# Altium PCB 94KA02-V1.PcbDoc (part 2 of 2)
Units mil, origin at the board's own origin, x right, y up, seen from the top; angles counter-clockwise.
Board outline 3951 x 3526 mil, 2 copper layers (Top Layer, Bottom Layer); 144 components, 142 nets, 661 pads, 434 vias.
Unrouted connection lines stored in the file: 1.
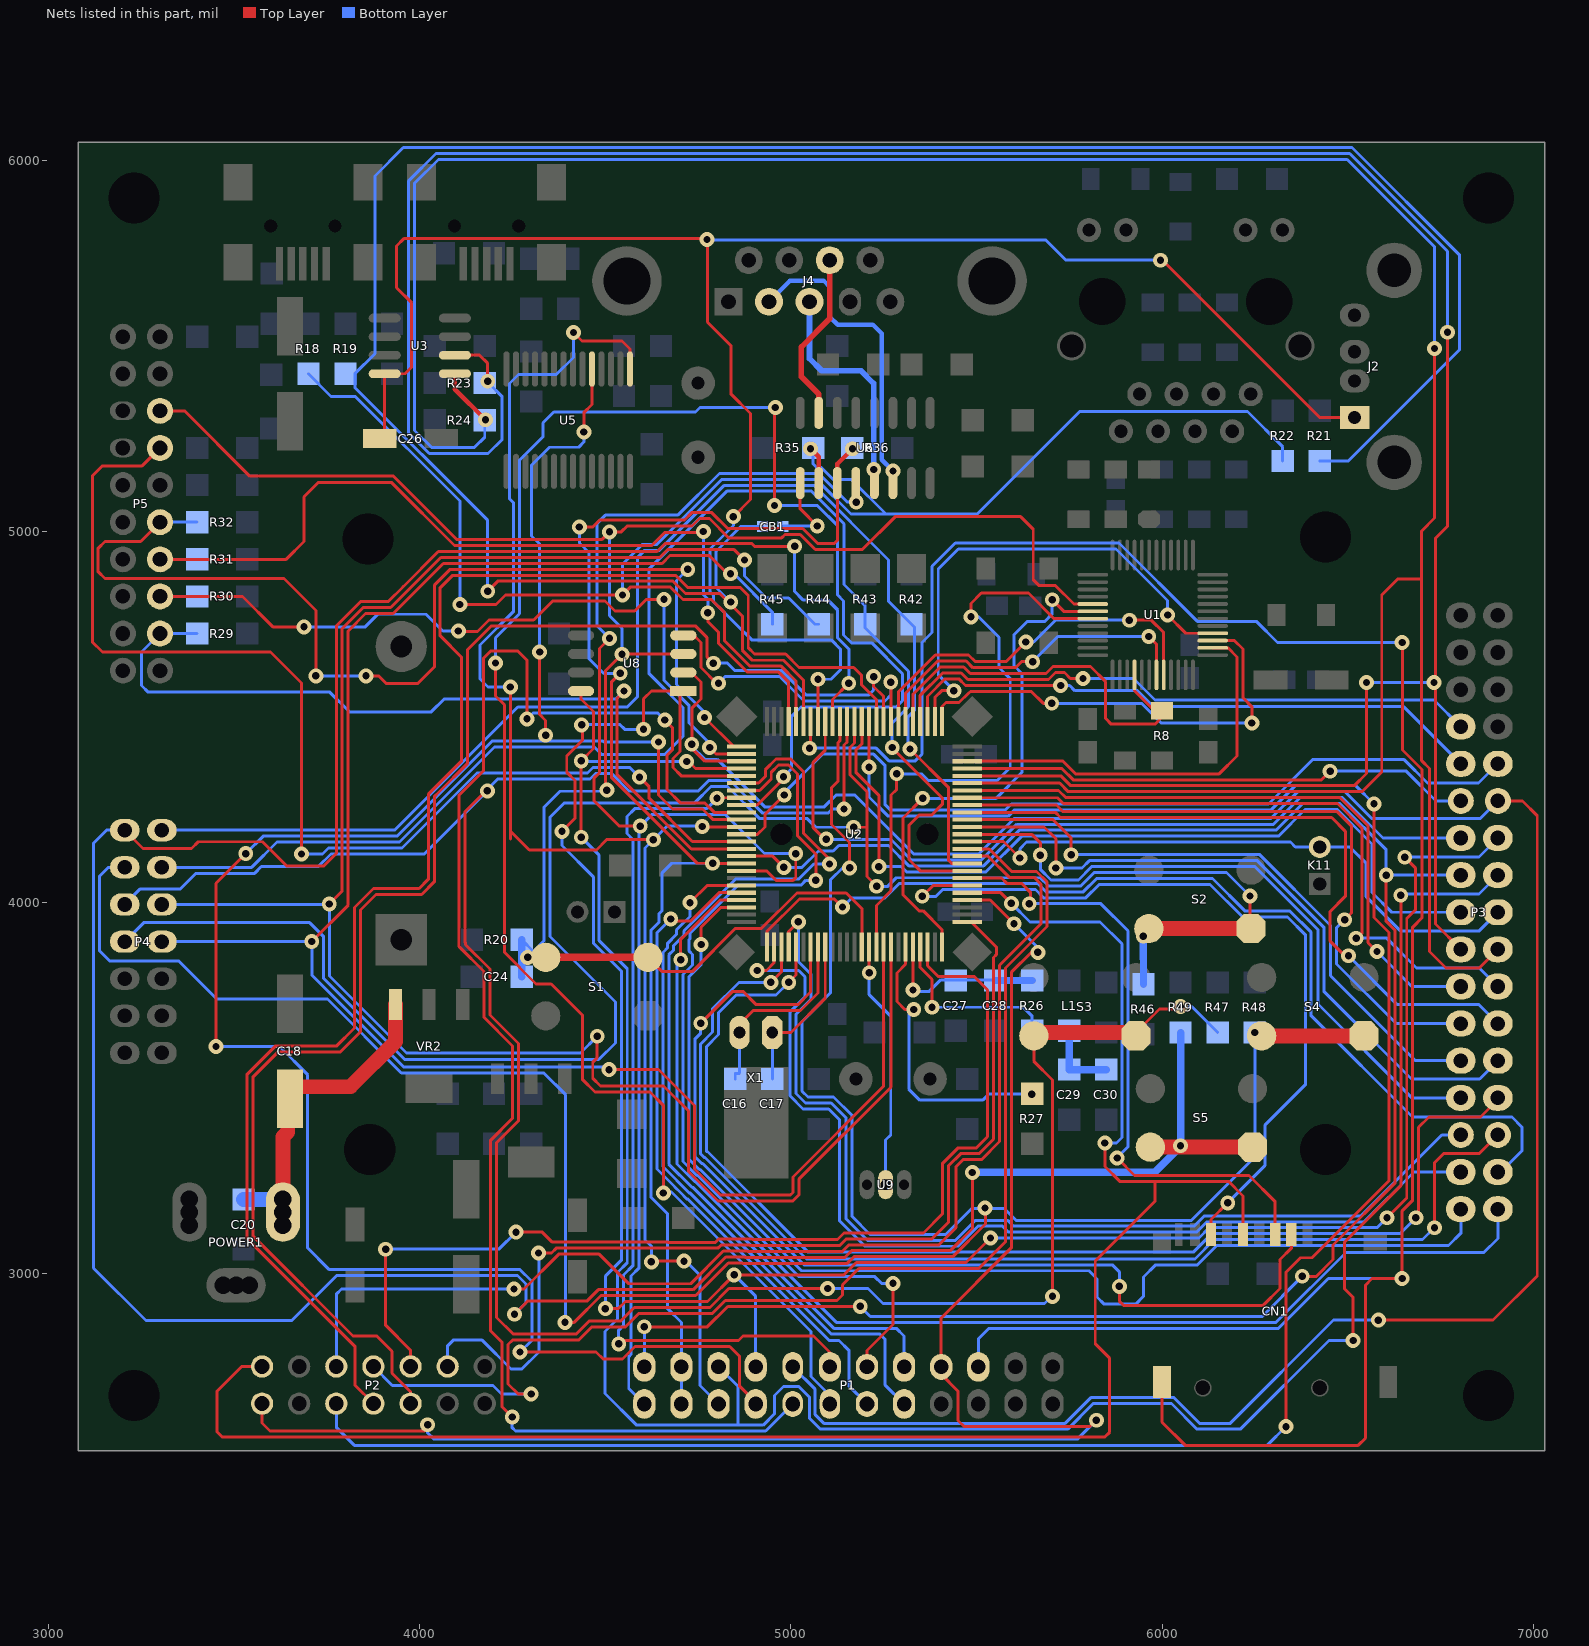
[diagram p2: the nets of this part, all layers, seen from the top]

## Via types
v1: diameter 40, hole 19.68, Top Layer to Bottom Layer, 416 vias
v2: diameter 40, hole 20, Top Layer to Bottom Layer, 16 vias
v3: diameter 50, hole 27.56, Top Layer to Bottom Layer, 1 vias
v4: diameter 40, hole 19.68, Top Layer to Bottom Layer, tented bottom, 1 vias

## Nets (pads, with @x,y where several pads share a name; then routed paths per layer and width w, separated by ;. In a path a pad name is that pad's centre, name@x,y a point inside that pad or via, vN(x,y) a via of type N, cw(c..) or ccw(c..) an arc to the next point about the centre after c; other vN are vias at no path point) (continued)
PA0: P2.10 U2.23 | length 2828.9
  Top Layer w8: v1(3908,3066) 3908,2861 3975,2794 P2.10@3975,2750 ; v1(4259,3112) 4330,3112 4357,3085 4669.15,3085 4669.44,3084.71 4796.46,3084.71 4804.75,3093 4895.51,3093 4896.51,3092 5125.24,3092 5143.24,3110 5357,3110 5408,3161 5408,3296.62 5450.75,3339.37 5500.12,3339.37 5530,3369.25 5530,3765 5494,3801 5397,3801 5368.07,3829.93 U2.23@5368.07,3880
  Bottom Layer w8: v1(3908,3066) 4213,3066 v1(4259,3112)
PA2: U1.30 U2.25 | length 1495.1
  Top Layer w8: v1(5355,4281) 5302,4228 5302,4021 5345,3978 5356.38,3978 5407.44,3926.94 U2.25@5407.44,3880 ; v1(5704,4816) 5735.16,4784.84 U1.30@5813.58,4784.84
  Bottom Layer w8: v1(5355,4281) 5553,4281 5623,4351 5623,4401 ; 5623,4459 5623,4412 ; v1(5704,4816) 5704,4778 5683,4757 5636,4757 5601,4722 5601,4638.63 5623,4616.63 5623,4412 ; 5623,4401 5623,4412 ; 5623,4401 5623,4412
PA3: P2.12 U2.26 | length 2695.6
  Top Layer w8: v1(4320,3056) 4355,3056 4367.71,3068.71 4803.09,3068.71 4811.37,3077 4888.88,3077 4889.88,3076 5131.86,3076 5149.86,3094 5380,3094 5424,3138 5424,3290 5457.37,3323.37 5506.74,3323.37 5546,3362.63 5546,3852 5553.58,3859.58 5553.58,3880.42 5486.09,3947.91 U2.26@5475.35,3947.91
  Bottom Layer w8: P2.12@4075,2750 4075,2806 4090,2821 4168,2821 4246,2743 4275,2743 4321,2789 v1@4321,3055
PA4: P1.18 P2.1 U2.29 | length 4396.1
  Top Layer w8: P2.1@3575,2650 3575,2598 3596.5,2576.5 v2@4013,2576.5 ; U2.29@5475.35,4006.97 5537.03,4006.97 v1(5601,3943) ; v1(5665.48,3865.85) 5648.15,3865.85 5648,3866 5594,3812 5594,3070 5405,2881 P1.18@5405,2749 5405,2729 5450.5,2683.5 5450.5,2604.5 5467,2588 5806,2588 v2(5823,2605)
  Bottom Layer w8: v2(4021,2593) 4021,2571.5 4037.5,2555 5773,2555 v2(5823,2605) ; v1(5601,3943) 5665.48,3878.52 v1@5665.48,3868 ; v1@5665.48,3868 v1(5665.48,3865.85) 5667.63,3868 v1@5665.48,3868
PA5: CN1.5 P2.2 U2.30 | length 5058.2
  Top Layer w8: P2.2@3575,2750 3520,2750 3454,2684 3454,2573.5 3467,2560.5 5583,2560.5 ; U2.30@5475.99,4026.02 U2.30@5475.35,4026.65 5565.35,4026.65 v1(5594,3998) ; 5587,2560.5 5583,2560.5 ; v1(5846,3352) 5846,3289 5886,3249 5981,3249 ; CN1.5@6218.39,3105.69 6218.39,3209.61 6179,3249 5981,3249 ; 5583,2560.5 5846.5,2560.5 5859,2573 5859,2772 5820,2811 5820,3034 5981,3195 5981,3249
  Bottom Layer w8: v1(5594,3998) 5644,3948 5833,3948 5892,3889 5892,3367 5877,3352 v1(5846,3352)
PA6: CN1.7 U2.31 | length 2173.5
  Top Layer w8: v1(5354,4017) v1@5356,4019 ; v1@5356,4017 v1@5356,4019 ; v1@5356,4021 v1@5356,4019 ; U2.31@5475.02,4046 U2.31@5475.35,4046.34 5383.34,4046.34 v1@5356,4019 ; CN1.7@6131.77,3105.69 6131.77,3145.77 v1(6177,3191)
  Bottom Layer w8: v1@5356,4019 v1(5354,4017) 5391,4017 5409,4035 5658.86,4035 5680.86,4013 5794.51,4013 5830.51,4049 6129.37,4049 6217.37,3961 6338.37,3961 6386,3913.37 6386,3702 6386,3509 6277,3400 6277,3291 v1(6177,3191)
PA7: CN1.3 U2.32 | length 1701.1
  Top Layer w8: U2.32@5475.35,4066.02 5567.72,4066.02 5581.75,4052 5621,4052 5645,4028 5645,4000 v1(5642,3997) ; v1(5879,3312) 5926,3265 6234,3265 6305,3194 CN1.3@6305,3105.69
  Bottom Layer w8: v1(5642,3997) 5835,3997 5908,3924 5908,3342 5879,3313 v1(5879,3312)
PA8: P3.22 U2.67 | length 2197.5
  Top Layer w8: U2.67@5092.48,4488.27 5092.48,4410.48 5060,4378 5060,4202 5091,4171 v1(5095,4171)
  Bottom Layer w8: v1(5095,4171) 5094,4170 5269.37,4170 5324.37,4115 5512.75,4115 5608.75,4211 6300.25,4211 6372.25,4283 6486.12,4283 6595.12,4174 P3.22@6805,4174
PA9: C26.1 J2.1 U2.68 U3.8 | length 5140.6
  Top Layer w8: C26.1@3904,5243 3905.51,5244.51 3905.51,5333.51 U3.8@3905.51,5425 3949,5425 3960,5425 3978,5443 3978,5616 3937,5657 3937,5769 3957,5789 4773,5789 v1@4775,5787 ; v1(4774,5787) v1@4775,5787 ; v1@4843,5042 v1(4845,5040) 4891,5086 4891,5318.02 4838,5371.02 4838,5501 4775,5564 v1@4775,5787 ; U2.68@5072.8,4488.27 v1(5072.8,4601.8) ; v1(5996,5731) 5996,5734 5998,5734 6424.8,5307.2 J2.1@6518.9,5307.2
  Bottom Layer w8: v1(4774,5787) 4774,5788 4776,5786 5686,5786 5740,5732 5996,5732 v1(5996,5731) ; v1(4845,5040) 4845,5016 4782,4953 4782,4838 4792,4828 4792,4810.25 4855,4747.25 4894.25,4708 5027,4708 5108.37,4708 5133,4683.37 5133,4627 5107.8,4601.8 v1(5072.8,4601.8) 5098.8,4601.8
PA10: CN1.10 P1.20 U2.69 | length 6571.7
  Top Layer w8: v1(5050,4416) 5053.11,4419.11 U2.69@5053.11,4488.27 ; CN1.10@5999.88,2708.06 5999.88,2600.12 6062.5,2537.5 6528.5,2537.5 6548,2557 6548,2969 6566,2987 v1(6647,2987) ; v1@6648,2988 v1(6647,2987) ; v1@6648,4701 6648,4411.37 6700.49,4358.88 6700.49,3959 6675.37,3933.88 6675.37,3197.74 6647,3169.37 v1(6647,2987)
  Bottom Layer w8: v1(5050,4416) 5229.75,4416 5263.75,4382 5335,4382 5353,4400 5353,4701.03 5380,4728.03 5380,4906 5443,4969 5884,4969 6095,4758 6254,4758 6311,4701 v1(6647,4701) ; P1.20@5505,2749 5505,2824 5534,2853 6314,2853 6448,2987 v1(6647,2987)
PA11: CB1.1 CB1.2 R19.1 R21.2 U2.70 U6.9 | length 6841.7
  Top Layer w8: v1(4183,4839) 4210,4866 4682.37,4866 4715.74,4832.63 4808.37,4832.63 4869,4772 4869,4680.14 4896.14,4653 4980.25,4653 5033.43,4599.83 U2.70@5033.43,4488.27 ; U6.9@5025,5105 U6.9@5025,5130.51 5025,5061 v1(5071,5015)
  Bottom Layer w8: v1(4183,4839) 4183,5030 3825,5388 3825,5425 3879,5479 3879,5958 3955.5,6034.5 6512.13,6034.5 6801,5745.63 6801,5489 6502,5190 R21.2@6425,5190 ; 4798,4871.75 4798,4849 ; v1(4838,4810) 4837,4810 4798,4849 ; CB1.2@4923,5013 4922,5014 4865.63,5014 4798,4946.37 4798,4849 ; CB1.1@4978,5013 4980,5015 v1(5071,5015) v1@5070,5014
PA12: R18.1 R22.2 R35.2 U2.71 U6.10 | length 4608.8
  Top Layer w8: v1(4108,4803) 4205,4803 4231,4829 v1(4546,4829) 4567,4850 4675.75,4850 4709.12,4816.63 4785.62,4816.63 4821.43,4780.82 4821.43,4705.08 4889.51,4637 4973.63,4637 5013.74,4596.89 U2.71@5013.74,4488.27
  Top Layer w12: v1(5053,5223) 5075,5201 U6.10@5075,5130.51
  Bottom Layer w8: R18.1@3700,5425 3761,5364 3826.37,5364 4108,5082.37 v1(4108,4803) ; v1(4546,4829) 4546,4911.88 4599.25,4965.13 4638.62,4965.13 4813.99,5140.5 5068.5,5140.5 5162,5047 5255,5047 ; R35.2@5060,5225 5060,5182 5069.5,5172.5 5081.75,5172.5 5114.63,5139.63 5163.37,5139.63 5256,5047 5502,5047 5778,5323 6230,5323 6325,5228 R22.2@6325,5190
  Bottom Layer w12: v1(5053,5223) R35.2@5053,5237
PA13: P5.7 R31.1 U2.72 | length 2478.2
  Top Layer w8: P5.7@3300,4925 3640,4925 3688,4973 3688,5093.5 3727,5132.5 3923.17,5132.5 4093.66,4962 4625,4962 4660,4997 4761,4997 v1(4764,5000) ; v1(4776,4781) 4776,4757.37 4805.43,4727.93 4805.43,4698.45 4882.88,4621 4967,4621 4994.05,4593.95 U2.72@4994.05,4488.27
  Bottom Layer w8: P5.7@3300,4925 R31.1@3400,4925 ; v1@4764,5015 v1(4764,5000) 4764,4830 4776,4818 v1(4776,4781)
PA14: P5.9 R32.1 U2.76 | length 3006.3
  Top Layer w8: P5.9@3300,5025 3248,4973 3151.5,4973 3133.5,4955 3133.5,4941 3133.5,4891.5 3152,4873 3634,4873 3720,4787 v1(3720,4611) ; v1(3855,4611) 3855.69,4610.31 3889.69,4610.31 3909,4591 3995,4591 4039,4635 4039,4855 4082,4898 v1(4722,4898) ; v1(4767,4499) 4845.65,4420.35 U2.76@4867.09,4420.35
  Bottom Layer w8: P5.9@3300,5025 R32.1@3400,5025 ; v1(3720,4611) v1(3855,4611) ; v1(4722,4898) 4692,4868 4692,4587.63 4767,4512.63 v1(4767,4499)
PA15: P5.5 R30.1 U2.77 | length 2119
  Top Layer w8: P5.5@3309,4826 3308,4825 3522,4825 3604,4743 v1(3688,4743) ; v1(4104,4732) 4105.31,4730.69 4155.31,4730.69 4186.41,4761.78 4306.78,4761.78 4358,4813 4499,4813 4526,4786 4579,4786 4610,4817 v1(4658,4817) ; v1(4781,4418) 4798.33,4400.67 U2.77@4867.09,4400.67
  Bottom Layer w8: P5.5@3300,4825 R30.1@3400,4825 ; v1(3688,4743) 3853,4743 3887,4777 4017,4777 4062,4732 v1(4104,4732) ; v1(4658,4817) 4658,4599 4725,4532 4725,4485 4781,4429 v1@4781,4419
PB0: P2.6 U2.35 | length 3285.2
  Top Layer w8: v1(4254,2959) 4280.63,2959 4374.34,3052.71 4483.29,3052.71 4563,2973 4730,2973 4818,3061 4882.25,3061 4883.25,3060 5138.49,3060 5156.49,3078 5399,3078 5445,3124 5445,3288.37 5464,3307.37 5513.37,3307.37 5562,3356 5562,3831 5674,3943 5674,4049.37 5655.37,4068 5588.37,4068 5531.29,4125.08 U2.35@5475.35,4125.08
  Bottom Layer w8: P2.6@3775,2750 3775,2945 3789,2959 v1(4254,2959)
PB1: P2.8 U2.36 | length 3384.2
  Top Layer w8: v2(4300,2676) 4265,2676 4238,2703 4238,2809.37 4249.63,2821 4427.63,2821 4462.63,2856 4553,2856 4590,2893 ; 4600.75,2893 4590,2893 ; U2.36@5475.35,4144.76 5534.24,4144.76 5595,4084 5662,4084 5690,4056 5690,3935.63 5578,3823.63 5578,3086 5506,3014 5183,3014 5139,2970 5139,2943 5124,2928 4823.25,2928 4788.25,2893 4590,2893
  Bottom Layer w8: P2.8@3875,2750 3926,2699 4197,2699 4220,2676 v2(4300,2676)
PB2: K11.2 P3.17 U2.37 | length 1652.9
  Top Layer w8: U2.37@5475.35,4164.45 5572.55,4164.45 v1(5617,4120)
  Bottom Layer w8: v1(5617,4120) 5617,4145 5635,4163 6346,4163 6359,4150 K11.2@6425,4150 6506,4150 6550,4106 6550,4016 6642,3924 6855,3924 P3.17@6905,3974
PB3: P5.13 U2.89 | length 3114.5
  Top Layer w8: P5.13@3300,5225 3252,5177 3145,5177 3117.5,5149.5 3117.5,4702.5 3145,4675 3598,4675 3681,4592 v1(3681,4131) ; v1(4592,4338) 4618,4312 4618,4280.88 4734.43,4164.45 U2.89@4867.09,4164.45
  Bottom Layer w8: v1(3681,4131) 3738,4131 3754,4147 3951.88,4147 4153.88,4349 4452,4349 4467,4364 4566,4364 v1(4592,4338)
PB4: P5.3 R29.1 U2.90 | length 2268.5
  Top Layer w8: v1(4550,4570) 4551,4571 4552,4571 4532,4551 4532,4344.25 4731.49,4144.76 U2.90@4867.09,4144.76
  Bottom Layer w8: R29.1@3400,4725 P5.3@3300,4725 3250,4675 3250,4585 3268,4567 3757.37,4567 3810.37,4514 4031,4514 4065,4548 4528,4548 v1(4550,4570)
PB5: P1.2 P3.20 U2.91 | length 5390.5
  Top Layer w8: v1(4605,2857) 4774.88,2857 4829.88,2912 v1(5187,2912) v1@5181,2906 ; U2.91@4867.09,4125.08 4950.92,4125.08 v1(4981,4095) ; v1(6378,2993) 6416,2993 6461,3038 6461,3077.37 6627.37,3243.74 6627.37,3926.26 6604,3949.63 v1(6604,4074)
  Bottom Layer w8: P1.2@4605,2749 4605,2844 v1@4619,2858 ; v1@4618,2858 v1@4618,2865 ; v1(4981,4095) 5030,4095 5074,4139 5114,4139 5129,4154 5262.75,4154 5317.75,4099 5519.37,4099 5615.37,4195 6306.88,4195 6378.88,4267 6479.49,4267 6604,4142.49 v1(6604,4074) ; v1(5187,2912) 5214,2885 6270,2885 v1(6378,2993) ; v1@6604,4069 v1(6604,4074) ; P3.20@6805,4074 v1(6604,4074)
PB6: P1.3 P1.4 R36.2 U2.92 U6.11 | length 3847
  Top Layer w8: v1(4430,5012) 4466,5012 4485,5031 4713,5031 4732.69,5050.69 4786.94,5050.69 4829.63,5008 5031.63,5008 5072.26,4967.37 5117,4967.37 5125,4975.37 U6.11@5125,5130.51 ; v1(4540,4618) 4516,4594 4516,4337.63 4747.63,4106 v1(4789,4106) ; v1@4789,4105.39 U2.92@4867.09,4105.39 U2.92@4866.48,4106
  Top Layer w12: U6.11@5125,5130.51 5125,5182 v1(5166,5223)
  Bottom Layer w8: v1(4430,5012) 4430,4969 4456,4943 4456,4657 4496,4617 4539,4617 4539,4619 v1(4540,4618) ; P1.3@4705,2649 P1.4@4705,2749 4705,2868.63 4668,2905.63 4668,3160.75 4623,3205.75 4623,3925.63 4644,3946.63 4644,3969.25 4652,3977.25 4652,4079 4679,4106 v1(4789,4106)
  Bottom Layer w12: R36.2@5165,5225 5166,5224 v1(5166,5223)
PB7: P1.1 U2.93 U6.12 | length 4007.9
  Top Layer w8: v1(4511,4712) 4484,4685 4484,4350 4469,4335 4469,4275 4538,4206 v1(4594,4206) ; U2.93@4867.09,4085.71 4934.29,4085.71 4960,4060 5006,4060 5013,4067 v1(5013,4132) ; v1@5176,5078 v1(5176,5079)
  Bottom Layer w8: v1(4511,4712) 4478,4745 4478,5022 4500,5044 4694.86,5044 4807.36,5156.5 5075.13,5156.5 5152.63,5079 v1(5176,5079) v1@5175,5078 ; v1@4594,4207 v1(4594,4206) ; P1.1@4605,2649 4563,2691 4563,2776.4 4568.94,2782.34 4568.94,2994.06 4591,3016.12 4591,4203 v1(4594,4206) ; v1(5013,4132) 4929,4132 4824,4237 4625,4237 v1(4594,4206)
PB8: P1.15 U2.95 | length 1886.9
  Top Layer w8: v1(4728,4000) 4774.34,4046.34 U2.95@4867.09,4046.34
  Bottom Layer w8: v1(4728,4000) 4728,3962.75 4692,3926.75 4692,3914.75 4668,3890.75 4668,3878.88 4655,3865.88 4655,3288.63 4726.63,3217 4729.02,3217 5109.02,2837 5240,2837 5253,2824 5253,2701 P1.15@5305,2649
PB9: P1.13 U2.96 | length 1823
  Top Layer w8: v1@4672.52,3950 4729.37,3950 4806.03,4026.65 U2.96@4867.09,4026.65
  Bottom Layer w8: v1@4679.11,3952.89 v1(4676,3956) 4639,3919 4639,3282 4701.07,3219.93 ; 4688,3233 4701.07,3219.93 ; P1.13@5205,2649 5156,2698 5156,2794 5129.8,2820.2 5103.2,2820.2 4722.4,3201 4720,3201 4701.07,3219.93
PB10: P3.24 U2.47 | length 1384.9
  Top Layer w8: U2.47@5475.35,4361.3 5730.07,4361.3 5760.46,4330.92 6429.92,4330.92 v1(6453,4354)
  Bottom Layer w8: v1(6453,4354) 6658,4354 6738,4274 P3.24@6805,4274
PB11: U1.2 U2.48 | length 1103.4
  Top Layer w8: U2.48@5475.35,4380.98 5733.02,4380.98 5767.08,4346.92 6153.92,4346.92 6202,4395 6202,4662 6177.58,4686.42 U1.2@6136.42,4686.42
PB12: U1.3 U2.51 | length 1226.9
  Top Layer w8: U2.51@5407.44,4488.27 5407.44,4528.44 5418,4539 5453,4539 5478.2,4564.2 5478.64,4564.2 5483.57,4569.13 5647.87,4569.13 5680,4537 v1(5703,4537) ; U1.3@6136.42,4706.1 6194.9,4706.1 6218,4683 6218,4552 6242,4528 v1(6242,4484)
  Bottom Layer w8: v1(5703,4537) 5831,4537 5944.75,4537 5997.75,4484 v1(6242,4484)
PB13: U1.4 U2.52 | length 1352.6
  Top Layer w8: U2.52@5387.76,4488.27 5387.76,4552.62 5406.14,4571 v1(5439,4571) ; v1(6015,4775) 6064.21,4725.79 U1.4@6136.42,4725.79
  Bottom Layer w8: v1@5438,4574 5440,4572 v1@5440,4571 ; v1(5439,4571) v1@5440,4571 ; v1(6015,4775) 6015,4814 5876,4953 5451,4953 5397,4899 5397,4614 v1@5440,4571
PB14: P3.26 U2.53 | length 1621.2
  Top Layer w8: U2.53@5368.07,4488.27 5368.07,4555.56 5415.51,4603 5452.25,4603 5470.12,4585.13 v1@5726.61,4585.13 ; v1@5725,4586.75 v1@5726.61,4585.13 ; v1@5726.61,4585.13 v1(5726.75,4585) v1@5726.61,4585.13
  Bottom Layer w8: v1(5726.75,4585) 5751,4585 5765,4571 5933.37,4571 5976.37,4528 6622,4528 6651,4528 P3.26@6805,4374
PB15: P3.28 U2.54 | length 1627.6
  Top Layer w8: U2.54@5348.39,4488.27 5348.39,4558.5 5408.88,4619 5458.88,4619 5476.75,4601.13 5694.13,4601.13 5713,4620 5737,4620 5753,4604 v1(5787,4604)
  Bottom Layer w8: v1(5787,4604) 5923,4604 5981,4546 6733,4546 P3.28@6805,4474
PC0: U2.15 U9.2 | length 670
  Top Layer w8: U2.15@5210.59,3880 5210.59,3811.41 v1(5211,3811)
  Bottom Layer w8: v1(5211,3811) 5211,3752 5269,3694 5269,3374 5255,3360 U9.2@5255,3240
PC1: U1.31 U2.16 | length 1684.2
  Top Layer w8: U2.16@5230.28,3880 5230.28,3992.28 5270,4032 5270,4290 5285,4305 v1(5285,4347) ; v1(5485,4770) 5485,4806 5513,4834 5640,4834 5708.84,4765.16 U1.31@5813.58,4765.16
  Bottom Layer w8: v1(5285,4347) 5352,4347 5370,4329 5555.75,4329 5591,4364.25 5591,4603.37 5561,4633.37 5561,4714.75 5505.75,4770 v1(5485,4770)
PC2: P4.8 R45.1 U2.17 | length 5101.7
  Top Layer w8: v1(3709,3895) 3807,3993 3807,4732 3854,4779 3928.25,4779 4063.25,4914 4653,4914 4674,4935 4780,4935 v1@4829,4886 ; v1(4510,3550) 4643,3550 4740,3453 4740,3282 4809.97,3212.03 4998.28,3212.03 5005.31,3219.06 5005.31,3260.94 5249.96,3505.59 U2.17@5249.96,3880
  Bottom Layer w8: P4.8@3305,3895 v1(3709,3895) 3709,3804.75 3956.75,3557 4503,3557 v1(4510,3550) ; v1@4829,4886 4846.37,4886 4950,4782.37 R45.1@4950,4750
  other v1: 4837,4886
PC3: P4.6 R44.1 U2.18 | length 5389.4
  Top Layer w8: v1(3756,3996) 3791,4031 3791,4738.63 3847.37,4795 3921.63,4795 4056.63,4930 4646.37,4930 4667.37,4951 4847,4951 v1(4875,4923) ; v1(4478,3640) 4478,3582 4466,3570 4466,3527 4487,3506 4657,3506 4724,3439 4724,3275.37 4803.34,3196.03 5004.91,3196.03 5021.31,3212.43 5021.31,3254.31 5269.65,3502.65 U2.18@5269.65,3880
  Bottom Layer w8: P4.6@3305,3995 v1@3755,3995 ; v1@3757,3995 3757,3802 3964,3595 4433,3595 v1(4478,3640) ; v1(4875,4923) 4875,4880 4934,4821 4994,4821 5065,4750 R44.1@5075,4750
PC4: P4.4 R43.1 U2.33 | length 3981.6
  Top Layer w8: v1(5273,4418) 5273,4416.75 5407.98,4281.76 5407.98,4264.98 5378.69,4235.69 5345,4235.69 5318,4208.69 5318,4116 5348.29,4085.71 U2.33@5475.35,4085.71
  Bottom Layer w8: P4.4@3305,4095 3547,4095 3615,4163 3945.25,4163 4201.25,4419 4470,4419 4490,4399 4660,4399 4709,4448 4709,4525.37 4618,4616.37 4618,4899.25 4827.25,5108.5 5055.25,5108.5 5143,5020.75 5143,4857 5200,4800 R43.1@5200,4750 5200,4740.15 5317,4623.15 5317,4528 5273,4484 v1(5273,4418)
PC5: P4.2 R42.1 U2.34 | length 3660.3
  Top Layer w8: v1(5321,4414) 5423.98,4311.02 5423.98,4134.29 5423.98,4114.61 5433.2,4105.39 U2.34@5475.35,4105.39
  Bottom Layer w8: P4.2@3305,4195 3932,4195 4264,4527 4559,4527 4586,4554 4586,4929.25 4605.87,4949.13 4645.25,4949.13 4820.62,5124.5 5061.87,5124.5 5263,4923.37 5263,4812 5278,4797 ; v1(5321,4414) 5316,4414 5316,4501 5333,4518 5333,4742 R42.1@5325,4750 ; 5278,4797 R42.1@5325,4750 ; 5278,4797 R42.1@5325,4750
PC6: P4.7 R46.1 S2.1 U2.63 | length 5275.3
  Top Layer w8: v1(5169,4203) 5202,4203 5205,4206 ; U2.63@5171.22,4488.27 5171.22,4430 5159,4417.78 5159,4344.37 5205,4298.37 5205,4206 ; v1(5231,4044) 5205,4070 5205,4206 ; v1(5949.53,3909.14) 5949,3927 5949,3930 S2.1@5950,3930 ; v1(6237,4018) 6237,3933 S2.1@6240,3930
  Top Layer w20: S2.1@5949,3927 v1(5949.53,3909.14)
  Top Layer w40: S2.1@5964.41,3930 S2.1@6240,3930
  Bottom Layer w8: P4.7@3205,3895 3256,3946 3703.25,3946 3741,3908.25 3741,3795.37 3959.37,3577 4482,3577 4527,3622 4527,3732.49 4351,3908.49 4351,4230 4390,4269 4741,4269 4785,4313 4829,4313 4916,4226 5044,4226 5067,4203 v1(5169,4203) ; v1(5231,4044) 5261,4044 5284,4067 5672.12,4067 5694.12,4045 5781.25,4045 5817.25,4081 6174,4081 v1(6237,4018)
  Bottom Layer w20: v1(5949.53,3909.14) R46.1@5950,3780
PC7: P4.5 R47.1 S3.1 U2.64 | length 6854
  Top Layer w8: v1(4182,4301) 4178,4301 4122,4245 4122,3893 4123,3892 4123,3886.75 4189,3820.75 4189,3697.42 4266,3620.42 4266,3412 4207,3353 4207,2882.37 4252.37,2837 4421,2837 4456,2872 4541,2872 4578,2909 4781.63,2909 4832.63,2960 v1(5099,2960) ; v1(5143,4252) 5143,4424.41 5151.54,4432.94 U2.64@5151.54,4488.27 ; S3.1@5654.7,3641.3 S3.1@5654.41,3641.59 ; v1(5705,2939) 5705,3522 5654.41,3572.59 S3.1@5654.41,3641 S3.1@5654.41,3641.59 ; S3.1@5930,3641 S3.1@5930,3650 ; S3.1@5930,3669.93 S3.1@5930,3650 ; v1(6050,3720) 6043,3713 5993,3713 S3.1@5930,3650 ; S3.1@5654.41,3641.59 5654.41,3650 5646,3650 S3.1@5654.41,3641.59
  Top Layer w40: S3.1@5654.41,3650 S3.1@5930,3650
  Bottom Layer w8: P4.5@3205,3995 3247,4037 3355,4037 3397,4079 3555,4079 3573,4097 3726.63,4097 3760.63,4131 4012,4131 v1(4182,4301) ; v1@4180,4303 4210,4333 4458.63,4333 4473.63,4348 4517,4348 4564,4301 4750.37,4301 4778.37,4329 4835.63,4329 4922.63,4242 5101,4242 5111,4252 v1@5142,4252 ; v1(5099,2960) 5208,2960 5248,2920 5683,2920 v1@5705,2942 ; v1(6050,3720) 6080,3720 R47.1@6150,3650
PC8: P4.3 R48.1 S4.1 U2.65 | length 6958.1
  Top Layer w8: v1(4391,2869) 4416,2869 4488,2941 4743.25,2941 4831.25,3029 4869,3029 4870,3028 5151.75,3028 5169.75,3046 5436,3046 5524,3134 v1@5524,3177 ; U2.65@5131.85,4488.27 5131.85,4435.88 5127,4431.03 5127,4327 5109.44,4309.44 5109.44,4210.56 5158,4162 v1@5158,4093.57 ; S4.1@6535,3645 6533,3645 6533,3643 6533,3641 S4.1@6544,3641
  Top Layer w40: S4.1@6268.41,3641 6531,3641 S4.1@6535,3645
  Bottom Layer w8: v1@4393,2871 4393,3482 4334,3541 3950.12,3541 3751.12,3740 3453,3740 3350,3843 3164,3843 3137,3870 3137,4071 3161,4095 P4.3@3203,4095 ; 5060,3710 5107,3757 5107,4061.75 5138.82,4093.57 v1(5158.31,4093.57) ; 5060.5,3709.5 5030,3679 5030,3492 5046,3476 5115,3476 5165,3426 5165,3154 5212.99,3106.01 5417.01,3106.01 5487,3176 5574.63,3176 5606.63,3144 6079.57,3144 6250,3314.43 v1(6250,3650) ; P4.3@3203,4095 P4.3@3205,4095 P4.3@3203,4095
  other v1: 5523,3177
PC9: P4.1 R49.1 S5.1 U2.66 | length 8778
  Top Layer w8: P4.1@3205,4195 3254,4146 3385,4146 3403,4164 3576,4164 3641,4099 3741.98,4099 3775,4132.02 3775,4745.25 3840.75,4811 3915,4811 3956,4852 ; 3955,4852 3956,4852 ; v1(4255,2891) 4290,2926 4450,2926 4481,2957 4736.63,2957 4824.63,3045 4875.63,3045 4876.63,3044 5145.12,3044 5163.12,3062 5429.37,3062 5489,3121.63 v1(5489,3273) ; v1(5010,4960) 4902,4960 4895,4967 4660.75,4967 4639.75,4946 4050,4946 3956,4852 ; U2.66@5112.17,4488.27 5112.17,4547.17 v1(5156,4591)
  Top Layer w20: v1(6050,3345) v1@6054,3341
  Top Layer w40: S5.1@5968.41,3341 v1@6054,3341 ; v1@6055,3341 S5.1@6244,3341
  Bottom Layer w8: P4.1@3223,4195 P4.1@3205,4195 3156,4195 3121,4160 3121,3015 3262,2874 3655,2874 3776,2995 4263.25,2995 4286,2972.25 4286,2922 v1(4255,2891) ; v1(5010,4960) 5010,4838 5032,4816 5099,4816 5126,4789 5126,4786.75 ; 5107.75,4805 5126,4786.75 ; v1(5156,4591) 5156,4683 5126,4713 5126,4754 ; 6050,3406 R49.1@6050,3650 ; 5126,4754 5126,4786.75 ; 5126,4754 5126,4786.75
  Bottom Layer w20: v1(5489,3273) 5980,3273 6050,3343 v1(6050,3345) ; v1@6050,3351 v1(6050,3345) ; R49.1@6050,3650 v1(6050,3345)
PC10: P1.10 P3.23 U2.78 U8.2 | length 6531.8
  Top Layer w8: U8.2@4710,4620 4731.87,4620 4757.43,4594.43 4757.43,4548.43 4733,4524 v1(4733,4426.75) 4733,4416 4768.02,4380.98 U2.78@4867.09,4380.98 ; v1(6583,2875) 6892,2875 7011,2994 7011,4234 6971,4274 P3.23@6905,4274
  Bottom Layer w8: v1(4733,4426.75) 4733,4420.75 4767.75,4386 4801.25,4386 4929.25,4258 5090,4258 5122,4290 5172,4290 5331,4131 5506.12,4131 5602.12,4227 6293.63,4227 6365.63,4299 6492.75,4299 6564.75,4227 6858,4227 P3.23@6905,4274 ; P1.10@5005,2749 5065.5,2688.5 5065.5,2620.14 5088.64,2597 5739,2597 5808,2666 6032,2666 6101,2597 6184,2597 6462,2875 v1(6583,2875)
PC11: P1.6 P3.19 U2.79 U8.8 | length 6531.9
  Top Layer w8: v1(4435,4176) v1(4435,4382) 4468,4415 4468,4515 4434.41,4548.59 U8.8@4434.41,4570 ; v1@4726,4378 4742.7,4361.3 U2.79@4867.09,4361.3 ; v1(6515,2820) 6515,2936 6492,2959 6492,3085.75 6643.37,3237.12 v1(6643.37,4019.63) ; U8.8@4434.41,4570 4435,4570 4435,4569.41 U8.8@4434.41,4570
  Bottom Layer w8: v1(4435,4176) 4483.47,4127.53 4483.47,3897.53 4559,3822 4559,3029.37 4533,3003.37 4533,2878 4499,2844 4499,2677 4583,2593 4858,2593 4858,2696 P1.6@4805,2749 ; v1(4435,4382) 4437,4380 v1(4719,4380) ; 4858,2592 4925.37,2592 4956,2622.63 4956,2672 4980,2696 5021.36,2696 5049.5,2667.86 5049.5,2611.5 5080,2581 5745.63,2581 5814.63,2650 6025.37,2650 6094.37,2581 6211,2581 6450,2820 v1(6515,2820) ; v1(6643.37,4019.63) 6640,4023 6854,4023 P3.19@6905,4074
PC12: P1.8 P3.21 U2.80 U8.1 | length 6255.5
  Top Layer w8: v1(4383,4192) 4418,4227 4418,4329 4396,4351 4396,4395 4438,4437 4438,4482 4436,4480 v1(4436,4479) ; v1(4500,2906) 4535,2906 4554,2925 4775,2925 v1(4847,2997) 5143.37,2997 5176.37,3030 5472,3030 v1(5538,3096) ; v1(4603,4467) 4603,4549 4624,4570 U8.1@4710,4570 4701,4561 4701,4407.25 4682,4388.25 4682,4364 4704.39,4341.61 U2.80@4867.09,4341.61 ; v1(6606,3151) 6659.37,3204.37 6659.37,3957.12 6683.58,3981.33 6683.58,4092.42 v1(6654,4122)
  Bottom Layer w8: v1(4383,4192) 4383,4154 4467.47,4069.53 4467.47,3890.9 4543,3815.37 4543,3036 4500,2993 v1(4500,2906) ; v1(4436,4479) 4437,4480 4539,4480 4552,4467 v1(4603,4467) ; v1(4847,2997) 4905,2939 P1.8@4905,2749 ; v1(5538,3096) 6099.45,3096 6127.45,3124 6579,3124 v1@6605.5,3150.5 ; v1(6654,4122) 6655,4123 6854,4123 P3.21@6905,4174 ; v1@6605.5,3150.5 v1(6606,3151) v1@6605.5,3150.5
PC13: CN1.2 U2.7 | length 2815.1
  Top Layer w8: v1(4757,3675) 4843,3761 4870.61,3761 4906.61,3725 5019.05,3725 5053.11,3759.06 U2.7@5053.11,3880 ; v1(5885,2966) 5885,2926 5896,2915 6273,2915 6318,2960 6318,3038 6348.31,3068.31 CN1.2@6348.31,3105.69
  Bottom Layer w8: v1(4757,3675) 4757,3648 4741,3632 4741,3315.76 4759.76,3297 4762.16,3297 5035.16,3024 5866,3024 5885,3005 v1(5885,2966) v1@5884,2967
PC14: C16.1 U2.8 X1.2 | length 527.6
  Top Layer w8: X1.2@4861.5,3650 4861.5,3672 4898.5,3709 5025.68,3709 5072.8,3756.12 U2.8@5072.8,3880
  Bottom Layer w8: C16.1@4850,3525 4850,3539 4860,3539 4861.5,3540.5 X1.2@4861.5,3650
PC15: C17.1 U2.9 X1.1 | length 454.4
  Top Layer w8: X1.1@4950,3650 5000,3650 5092.48,3742.48 U2.9@5092.48,3880
  Bottom Layer w8: C17.1@4950,3525 X1.1@4950,3650 4950,3654 X1.1@4955,3659
PD0: P1.16 U2.81 | length 2517.6
  Top Layer w8: U2.81@4867.09,4321.93 4913,4321.93 4931,4339.93 4931,4357.88 4960.12,4387 4999.88,4387 5034,4352.88 5034,4186.63 5104,4116.63 v1(5104,4104)
  Bottom Layer w8: v1(5104,4104) 5061.63,4104 5020.63,4063 4851,4063 4711.85,3923.85 4711.85,3911.96 4684,3884.12 4684,3872.25 4671,3859.25 4671,3295.25 4733.25,3233 4735.65,3233 5115.65,2853 5284,2853 5305,2832 P1.16@5305,2749
PD1: P1.14 U2.82 | length 2491
  Top Layer w8: U2.82@4867.09,4302.24 4915.94,4302.24 4947,4333.3 4947,4351.25 4966.75,4371 4993.25,4371 5018,4346.25 5018,4180 5067,4131 v1(5067,4060) ; P1.14@5205,2749 5205,2793 5275,2863 v1(5275,2974)
  Bottom Layer w8: v1(5067,4060) 5040.25,4060 5027.25,4047 4857.63,4047 4727.85,3917.22 4727.85,3902.1 4726,3900.25 4726,3869 4735,3860 4735,3832 4709,3806 4709,3302.51 4746.51,3265 4748.91,3265 5021.91,2992 5226,2992 5244,2974 v1(5275,2974)
PD2: P1.12 U2.83 | length 2393.5
  Top Layer w8: v1(4536,2811) 4545,2820 4859,2820 4871,2832 5061,2832 5105,2788 P1.12@5105,2749 ; v1@4816,4282.56 U2.83@4867.09,4282.56
  Bottom Layer w8: v1(4536,2811) 4536,2848 4549,2861 4549,2996.75 4575,3022.75 4575,4169 4558,4186 4558,4232 4579,4253 4773,4253 v1(4801,4281)
PD3: P1.11 U2.84 | length 5509.4
  Top Layer w8: v1(4204,4645.68) 4204,4557 4228,4533 4228,3866 4313,3781 4354,3781 4438,3697 4438,3524 4472,3490 4620,3490 4656.3,3453.7 v1(4656.3,3217.7) ; U2.84@4867.09,4262.87 4909.24,4262.87 4980,4333.63 v1(4980,4339) ; v1(4956,5070) 4956,5332 v1(4958,5334)
  Bottom Layer w8: v1(4204,4645.68) 4204,4713.37 4269,4778.37 4269,5192 4332,5255 4332,5292.88 4361.12,5322 4743,5322 4755,5334 v1(4958,5334) ; v1(4656.3,3217.7) 4658.79,3220.19 4678.19,3220.19 5054,2844.37 5054,2723 5105,2672 P1.11@5105,2649 ; v1(4956,5070) 5071.12,5070 5126,5015.12 5126,4828.75 5142,4812.75 5142,4721 5163,4700 5217.52,4700 5301,4616.52 5301,4544 5284,4527 5027,4527 5002,4502 5002,4361 v1(4980,4339)
PD4: P1.9 U2.85 | length 4106.4
  Top Layer w8: v2(4249,2614) 4222,2641 4222,2815 4191,2846 4191,3359.63 4250,3418.63 4250,3613.8 4173,3690.8 4173,3814.12 4106,3881.12 4106,4290 4172,4356 4172,4658.93 4191.07,4678 4264,4678 4289,4653 v1(4289,4495) ; v1(4660.25,4492) 4680.44,4471.82 4680.44,4411.44 4666,4397 4666,4305 4703.05,4267.95 4768.68,4267.95 4793.44,4243.19 U2.85@4867.09,4243.19
  Bottom Layer w8: v2(4249,2614) 4249,2585 4258,2576 4932,2576 P1.9@5005,2649 ; v1(4289,4495) 4305,4511 4641.25,4511 v1(4660.25,4492)
PD5: P1.7 U2.86 U5.5 | length 5687.1
  Top Layer w8: v1(3451,3612) 3451,4052 v1(3531,4132) ; v1(4270,2789) 4436,2789 4475,2789 4494,2770 4546,2770 4580,2804 4835,2804 4861,2778 4861,2698 4910,2649 P1.7@4905,2649 ; v1(4323,4675) 4322,4674 4322,4508 4339,4491 v1(4339,4451) ; v1(4442,5268) 4442,5320 4463.98,5341.98 U5.5@4463.98,5437.79 ; v1(4643,4433) 4643,4290 4681.05,4251.95 4762.05,4251.95 4790.5,4223.5 U2.86@4867.09,4223.5
  Bottom Layer w8: v1(3451,3612) 3622,3612 3698,3536 3698,3069 3755,3012 4268.88,3012 4302,2978.88 4302,2821 v1(4270,2789) ; v1(3531,4132) 3578,4179 3938.63,4179 4194.63,4435 v1@4339,4435 ; v1(4323,4675) 4323,4966 4301,4988 4301,5178.75 4349.25,5227 4428,5227 4442,5241 v1(4442,5268) ; v1(4339,4451) v1@4339,4435 ; v1(4643,4433) 4496,4433 4494,4435 v1@4339,4435
PD6: P1.5 U2.87 U5.1 | length 4207.5
  Top Layer w8: 4244,4172 4244,4193 ; v1(4244,4581) 4244,4193 ; v1(4414,5536) 4437,5513 4545,5513 4566.34,5491.66 U5.1@4566.34,5437.79 ; v2(4624,3032) 4626,3034 v2(4712,3034) ; v1(4629.42,4169.42) 4503.42,4169.42 4476,4142 4295,4142 4244,4193 ; v1@4762.18,4203.82 U2.87@4867.09,4203.82
  Bottom Layer w8: v1(4244,4581) 4184,4581 4162,4603 4162,4694 4253,4785 4253,5077 4242,5088 4242,5399 4266,5423 4368,5423 4414,5469 v1(4414,5536) ; v2(4624,3032) 4624,3074 4607,3091 4607,4147 v1(4629.42,4169.42) 4666,4206 v1@4769,4206 ; v2(4712,3034) 4700,3034 4697,3031 4720,3031 4755,2996 4755,2699 P1.5@4805,2649
  other v1: 4761,4205
PD7: P3.25 U2.88 | length 2380.3
  Top Layer w8: U2.88@4867.09,4184.13 4910.13,4184.13 4930,4204 4930,4238 v1(4982,4290)
  Bottom Layer w8: v1(4982,4290) 4982,4295.75 5085,4398.75 5085,4400 5223.12,4400 5253,4370.12 5253,4265 5269,4249 5577,4249 5594,4266 6287,4266 6407,4386 6651,4386 6715,4322 6853,4322 P3.25@6905,4374
PD8: R8.2 U1.40 U2.55 | length 1050.7
  Top Layer w8: U2.55@5328.7,4488.27 5328.7,4561.45 5402.25,4635 5465.51,4635 5483.38,4617.13 5687.51,4617.13 5706.37,4636 5807,4636 5848,4595 5848,4496 5863.11,4480.89 5980.89,4480.89 6000,4500 R8.2@6000,4516.99 ; U1.40@5925.79,4613.58 5925.79,4571.14 R8.2@5975.96,4520.96
PD9: U1.43 U2.56 | length 921.2
  Top Layer w8: U2.56@5309.02,4488.27 5309.02,4564.39 5395.63,4651 5472.14,4651 5490,4633.13 5605.13,4633.13 5621.13,4649.13 v1(5651.27,4649.13) ; v1(5964,4717) 5984.84,4696.16 U1.43@5984.84,4613.58
  Bottom Layer w8: v1(5651.27,4649.13) 5719.13,4717 v1(5964,4717)
PD10: U1.44 U2.57 | length 1016.3
  Top Layer w8: U2.57@5289.33,4488.27 5289.33,4567.33 5389,4667 5478.76,4667 5495.76,4650 5581,4650 v1(5633,4702) ; v1(5912,4761) 5971,4761 6004.53,4727.47 U1.44@6004.53,4613.58
  Bottom Layer w8: v1(5633,4702) 5654,4702 5713,4761 v1(5912,4761)
PD11: U2.58 U8.4 | length 834.4
  Top Layer w8: U8.4@4710,4720 4738,4720 4757.43,4700.57 4757.43,4633.31 4799.75,4591 v1(4805,4591) ; v1(5269,4594) 5269.65,4593.35 U2.58@5269.65,4488.27
  Bottom Layer w8: v1(4805,4591) 4823,4609 4969,4609 5035,4543 5253.3,4543 5269,4558.7 v1(5269,4594)
PD12: P2.9 U2.59 | length 4056.9
  Top Layer w8: P2.9@3975,2650 3975,2682 3925,2732 3925,2791 3884,2832 3820,2832 3551,3101 3551,3531 3617,3597 3785,3597 3840,3652 3840,3980 3882,4022 4005,4022 4039,4056 4039,4285.23 4051.89,4298.11 4128,4374.22 4128,4680.75 4193.03,4745.78 4742.33,4745.78 4773.43,4714.68 4773.43,4662.57 v1(4791,4645) ; v1(5222.81,4608.85) 5222.81,4582.29 5249.96,4555.15 U2.59@5249.96,4488.27
  Bottom Layer w8: v1(4791,4645) 4829,4645 4849,4625 4975.63,4625 5041.63,4559 5209.56,4559 5222.81,4572.25 v1(5222.81,4608.85)
PD13: P2.7 U2.60 | length 4254.6
  Top Layer w8: P2.7@3875,2650 3826,2699 3826,2803.37 3535,3094.37 3535,3537.63 3610.37,3613 3775,3613 3824,3662 3824,3986.63 3875.37,4038 3998.37,4038 4023,4062.63 4023,4291.85 4112,4380.85 4112,4662 4055,4719 4055,4848.37 4088.63,4882 4689,4882 4722.37,4848.63 4864,4848.63 4885,4827.63 4885,4686.76 4901.76,4670 4985.88,4670 5022.09,4633.8 5169.2,4633.8 5190.81,4612.19 5190.81,4586.19 5230.28,4546.72 U2.60@5230.28,4488.27
PD14: P2.5 U2.61 | length 6144.2
  Top Layer w8: v1@5210.59,4352.41 v1(5210.59,4365) U2.61@5210.59,4488.27 ; v1(6334,2588) 6334,3004 6373,3043 6404,3043 6611.37,3250.37 6611.37,3919.63 6571,3960 v1(6571,4266)
  Bottom Layer w8: P2.5@3775,2650 3775,2586 3823.5,2537.5 6283.5,2537.5 v1(6334,2588) ; v1(5210.59,4365) 5210.59,4284.41 5262,4233 5585.49,4233 5602.49,4250 6294,4250 6359,4315 6522,4315 v1(6571,4266)
PD15: P3.18 U2.62 | length 2258.3
  Top Layer w8: U2.62@5190.91,4488.27 5190.91,4427.06 5175,4411.15 5175,4351 5237,4289 v1(5237,4097)
  Bottom Layer w8: v1(5237,4097) 5297.12,4097 5311.12,4083 5526,4083 5622,4179 6313.51,4179 6385.51,4251 6472.86,4251 6566,4157.86 6566,4027 6619,3974 P3.18@6805,3974
PE0: P3.1 U2.97 | length 3380.9
  Top Layer w8: v1(4703,3846) 4703,3901 4717.64,3915.64 ; 4711,3909 4717.64,3915.64 ; U2.97@4867.09,4006.97 4808.97,4006.97 4717.64,3915.64
  Bottom Layer w8: v1@4693,3843 4693,3295.88 4739.88,3249 4742.28,3249 5122.28,2869 6307.37,2869 6495.37,3057 6867,3057 6905,3095 P3.1@6905,3174
PE1: P3.2 U2.98 | length 3214.6
  Top Layer w8: v1(4758,3887) 4758,3933.37 4811.91,3987.28 U2.98@4867.09,3987.28
  Bottom Layer w8: v1(4758,3887) 4758,3832.37 4725,3799.37 4725,3309.14 4753.14,3281 4755.53,3281 5028.53,3008 5803,3008 5825,2986 5825,2937 5844,2918 5929,2918 5950,2939 5950,2991 5983,3024 6095.33,3024 6147.33,3076 6772,3076 6805,3109 P3.2@6805,3174
PE2: P3.3 U2.1 | length 2734
  Top Layer w8: U2.1@4935,3880 4935,3922.16 5022.84,4010 5117,4010 v1(5139,3988)
  Bottom Layer w8: v1(5139,3988) 5163,4012 5252,4012 5291,4051 5665.49,4051 5687.49,4029 5787.88,4029 5823.88,4065 6136,4065 6224,3977 6345,3977 6402,3920 6402,3695 6675,3422 6943,3422 6969.5,3395.5 6969.5,3331 6912.5,3274 P3.3@6905,3274
PE3: P3.4 U2.2 | length 2800.3
  Top Layer w8: v1(4909,3817) 4933.84,3817 ; 4934,3817 4954.68,3837.68 U2.2@4954.68,3880
  Bottom Layer w8: v1(4909,3817) 5021,3817 5038,3800 5038,3746 4998,3706 4998,3478.75 5032.75,3444 5101.75,3444 5130.37,3415.37 5130.37,3143.37 5199.74,3074.01 5450.01,3074.01 5504,3128 5570,3128 5586,3112 6092.82,3112 6120.82,3140 6545,3140 6679,3274 P3.4@6805,3274
PE4: P3.5 U2.3 | length 3205.7
  Top Layer w8: v1(4946,3785) 4974.37,3813.37 ; 4974.37,3814.37 U2.3@4974.37,3880 ; v1@6732,3126 v1(6734,3124) 6734,3299 6759,3324 6855,3324 P3.5@6905,3374
  Bottom Layer w8: v1(4946,3785) 4860,3785 4789,3714 4789,3651 4757,3619 4757,3322.39 4766.39,3313 4768.79,3313 5041.79,3040 6088.71,3040 6140.71,3092 6702,3092 v1(6734,3124)
PE5: P3.6 U2.4 | length 2817.2
  Top Layer w8: U2.4@4994.05,3880 4994.05,3922.15 v1@5019.9,3948 ; v1@5019.9,3948 v1(5020,3948) v1@5019.9,3948
  Bottom Layer w8: v1(5020,3948) 5020,3841 5054,3807 5054,3739.37 5014,3699.37 5014,3485.37 5039.37,3460 5108.37,3460 5149,3419.37 5149,3147.37 5206.36,3090.01 5443.38,3090.01 5497.37,3144 5584,3144 5600,3128 6086.2,3128 6114.2,3156 6536,3156 6754,3374 P3.6@6805,3374
PE6: P3.7 U2.5 | length 3271.3
  Top Layer w8: v1(4994,3785) 5013.74,3804.74 U2.5@5013.74,3880 ; v1(6684,3151) 6691.37,3158.37 6691.37,3394.37 6719,3422 6858,3422 6905,3469 P3.7@6905,3474
  Bottom Layer w8: v1(4994,3785) 4960,3751 4852.63,3751 4805,3703.37 4805,3644.37 4773,3612.37 4773,3329.02 4775.42,3329 5046.41,3058.01 6084.09,3058.01 6134.08,3108 6641,3108 v1(6684,3151)
PE7: P3.8 U2.38 | length 1812.5
  Top Layer w8: U2.38@5475.35,4184.13 5648.87,4184.13 5672,4161 v1(5672,4128)
  Bottom Layer w8: v1(5672,4128) 5672,4089.75 5700.75,4061 5774.63,4061 5810.63,4097 6250,4097 6420,3927 6420,3727 6673,3474 P3.8@6805,3474
PE8: P3.9 U2.39 | length 1895.1
  Top Layer w8: U2.39@5475.35,4203.82 5682.18,4203.82 5714,4172 v1(5714,4093)
  Bottom Layer w8: v1(5714,4093) 5784,4093 5804,4113 6256.63,4113 6436,3933.63 6436,3761 6672,3525 6856,3525 P3.9@6905,3574
PE9: P3.10 U2.40 | length 1704.9
  Top Layer w8: U2.40@5475.35,4223.5 5706.5,4223.5 5755,4175 v1(5755,4129)
  Bottom Layer w8: v1(5755,4129) 6263.25,4129 6454,3938.25 6454,3803 6683,3574 P3.10@6805,3574
PE10: P3.11 U2.41 | length 1896.8
  Top Layer w8: U2.41@5475.35,4243.19 5712.42,4243.19 5726.61,4229 6457,4229 6494,4192 6494,4017 6453,3976 6453,3896 6492.29,3856.71 v1(6502.4,3856.71)
  Bottom Layer w8: v1(6502.4,3856.71) 6634.12,3725 6854,3725 P3.11@6905,3674
PE11: P3.12 U2.42 | length 1847.6
  Top Layer w8: U2.42@5475.35,4262.87 5715.36,4262.87 5733.24,4245 6471.84,4245 6510,4206.84 6510,3972 v1(6492,3954)
  Bottom Layer w8: v1(6492,3954) 6470.4,3932.4 6470.4,3863 6470.4,3834.66 6631.06,3674 P3.12@6805,3674
PE12: P3.13 U2.43 | length 1838.3
  Top Layer w8: U2.43@5475.35,4282.56 5718.3,4282.56 5733.95,4266.92 6472.54,4266.92 6539,4200.46 6539,3917 6526,3904 v1(6523,3904)
  Bottom Layer w8: v1(6523,3904) 6605.75,3904 6685.75,3824 6855,3824 P3.13@6905,3774
PE13: P3.14 U2.44 | length 1783.7
  Top Layer w8: 5526,4302.24 U2.44@5475.35,4302.24 5721.25,4302.24 5740.57,4282.92 6479.17,4282.92 6555,4207.09 6555,3892 v1(6579,3868)
  Bottom Layer w8: v1(6579,3868) 6673,3774 P3.14@6805,3774
PE14: P3.15 R24.1 U2.45 U3.1 | length 7873
  Top Layer w8: U2.45@5475.35,4321.93 5724.19,4321.93 5747.2,4298.92 6538.92,4298.92 6592,4352 6592,4829 6635,4872 6696.58,4872 6699.58,4869 ; v1(6734,5493) 6734,5036 6699.58,5001.58 6699.58,4869 ; P3.15@6905,3874 6855,3824 6765,3824 6721,3868 6721,4361 6699.58,4382.42 6699.58,4869
  Top Layer w12: U3.1@4094.49,5425 4094.49,5383.51 v1(4177,5301)
  Bottom Layer w8: R24.1@4183,5292 R24.1@4175,5300 4175,5254 4147,5226 4032.25,5226 3986,5272.25 3986,5938.37 4050.13,6002.5 6498.87,6002.5 6734,5767.37 v1(6734,5493)
  Bottom Layer w12: R24.1@4175,5300 4176,5301 v1(4177,5301)
PE15: P3.16 R23.1 U2.46 U3.2 | length 7702.7
  Top Layer w8: U3.2@4094.49,5475 4161,5475 4183,5453 v1(4183,5405) ; U2.46@5475.35,4341.61 5727.13,4341.61 5753.83,4314.92 6517.92,4314.92 6551,4348 v1(6551,4593) ; v1(6733,4593) v1@6737,4597 ; v1(6769,5537) 6764,5542 6763,5542 6769,5536 6769,5014 6737,4982 v1@6737,4597 ; P3.16@6805,3874 6737,3942 v1@6737,4597
  Bottom Layer w8: R23.1@4175,5400 4185,5400 4222,5363 4222,5248 4184,5210 4140,5210 4025.63,5210 3970,5265.63 3970,5945 4043.5,6018.5 6505.5,6018.5 6769,5755 v1(6769,5537) ; v1(6551,4593) v1(6733,4593)
RESET: C24.2 P5.15 R20.1 S1.2 U1.29 U2.14 U8.3 | length 5760.5
  Top Layer w8: P5.15@3300,5325 3366,5325 3542,5149 3929.29,5149 4100.29,4978 4490,4978 v1(4511,4999) 4543,4999 4559,5015 4733.75,5015 4753.43,5034.69 4780.31,5034.69 4832,4983 4975,4983 4984,4992 5025,4992 5065.63,4951.37 5192.37,4951.37 5281,5040 5619,5040 5653,5006 5653,4870.03 5669.03,4854 5713,4854 5762.47,4804.53 U1.29@5813.58,4804.53 ; v1(4504,4303) 4500,4307 4500,4624 v1(4545,4669) ; v1@4546,4670 U8.3@4710,4670 ; 4565.52,3852.48 4577,3852.48 S1.2@4615,3852.48 4653.48,3814 4734,3814 4850,3930 4920.22,3930 5016.22,4026 5149,4026 5190.91,3984.09 U2.14@5190.91,3880
  Top Layer w20: v1(4290.48,3852.48) S1.2@4339.41,3852.48 4577,3852.48 S1.2@4615,3852.48
  Bottom Layer w8: R20.1@4275,3900 4306.5,3868.5 ; v1(4290.48,3852.48) 4306.5,3868.5 ; v1@4504,4300 4378,4300 4335,4257 4335,3897 4306.5,3868.5 ; v1(4511,4999) 4511,4773 4545,4739 v1(4545,4669)
  Bottom Layer w20: C24.2@4275,3800 4275,3852.48 R20.1@4275,3900
RTS: J4.8 U6.7 | length 462.6
  Top Layer w15: U6.7@5075,5319.49 5075,5370 5028,5417 5028,5497 5104.53,5573.53 J4.8@5104.53,5730.89
RXD: J4.3 U6.13 | length 623.1
  Top Layer w8: U6.13@5223,5132.51 U6.13@5225,5130.51
  Top Layer w15: U6.13@5223,5132.51 v1(5223,5167)
  Bottom Layer w15: J4.3@5050,5619.08 5050,5466 5083,5433 5189,5433 5223,5399 v1(5223,5167)
TXD: J4.2 U6.14 | length 841.4
  Top Layer w8: U6.14@5275,5130.51 5275,5110 U6.14@5277,5110
  Bottom Layer w12: J4.2@4940.94,5619.08 4996.87,5675 5089,5675 5105,5659 5105,5578 5126,5557 5221,5557 5244.5,5533.5 5244.5,5193.58 v1(5275,5163.08) v1@5275,5160
VCC: C18.1 C20.1 POWER1.1 VR2.3 | length 992
  Top Layer w8: C18.1@3644,3478 3644,3472.05 C18.1@3650,3472.05 3650,3504 C18.1@3665,3504
  Top Layer w40: POWER1.1@3631,3166 POWER1.1@3631,3201 3631,3369 3644,3382 3644,3472.05 C18.1@3644,3478 ; C18.1@3665,3504 3813,3504 3934.45,3625.45 VR2.3@3934.45,3725.2
  Bottom Layer w8: POWER1.1@3631,3131 POWER1.1@3631,3166 3631,3182 3632,3183 3632,3201 POWER1.1@3632,3210
  Bottom Layer w40: C20.1@3525,3200 3622,3200 POWER1.1@3627,3205 ; POWER1.1@3631,3201 POWER1.1@3627,3205 ; POWER1.1@3632,3210 POWER1.1@3627,3205
VDDA: C29.1 C30.1 L1.2 R26.2 U2.22 | length 799
  Top Layer w8: U2.22@5348.39,3880 5348.39,3825 5380,3793.39 v1(5380,3718)
  Bottom Layer w8: v1(5380,3718) 5626,3718 5650,3694 R26.2@5650,3655
  Bottom Layer w20: R26.2@5650,3655 L1.2@5750,3655 C29.1@5750,3550 C30.1@5850,3550
VREF+: C27.1 C28.1 R26.1 U2.21 | length 452
  Top Layer w8: v1(5328.7,3764.3) U2.21@5328.7,3880
  Bottom Layer w8: v1(5328.7,3764.3) 5332,3761 5373,3761 5404,3792 5548,3792 C28.1@5550,3790
  Bottom Layer w20: C28.1@5550,3790 R26.1@5650,3790
VREF-: R27.2 U2.20 | length 782.4
  Top Layer w8: U2.20@5309.02,3880 5309.02,3834 5285.65,3810.63 5285.65,3733.35 5307,3712 v1(5331,3712) ; v1(5649,3484) R27.2@5650,3485
  Bottom Layer w8: v1(5331,3712) 5317.72,3698.72 5317.72,3497.28 5347.28,3467.72 5516.72,3467.72 5533,3484 v1(5649,3484)
pads on no net: 1.1 2.1 3.1 4.1 5.1 6.1 7.1 8.1 CN1.0 CN1.1 CN1.8 CN1.sh1 CN1.sh3 CN1.sh4 J1.7 J1.8 J1.9 J1.MH1 J1.MH2 J3.7 J3.8 J3.9 J3.MH1 J3.MH2 J4.1 J4.4 J4.6 J4.9 P2.3 P2.4 P5.17 RJ1. RJ1.7 RJ1.8 U1.1 U1.5 U1.6 U1.8 U1.9 U1.10 U1.11 U1.12 U1.25 U1.27 U1.33 U1.38 U1.41 U1.42 U1.45 U1.46 U2.0 U2.73 U3.3 U3.5 U5.2 U5.3 U5.6 U5.8 U5.9 U5.10 U5.11 U5.12 U5.13 U5.14 U5.19 U5.24 X1.gnd

## Polygon pours and split planes (outlines as drawn)
GND on Top Layer "TopLayer-No Net" (solid, remove dead copper, pour order 1000): 3032,6122 3050.2,6103.81 7105.59,6103.81 7105.59,2459.38 7143,2422 3041.1,2422
GND on Bottom Layer "TopLayer-No Net" (solid, remove dead copper, pour order 1001): 7031,2523 7031,6085.2 7022.18,6094 3020,6094 3020,2523

## Keep-outs
Keep-Out Layer:
  the board outline again, w5

## Other copper
Top Layer:
  text "Naminic.com" at 6239,5964 h60
  text "ST" at 6442,5864 h60
Bottom Layer:
  text "Naminic.com" at 6939,5660 h60 r90

## Silkscreen, mask and mechanical layers (free items; w line width, h text height)
Top Overlay:
  text "RESET" at 4378,3566 h60
Bottom Overlay:
  drawing of 248 lines, arcs and shapes, not listed
  text "Naminic.com" at 4153,4361 h100

## Text inside footprints (layer, text, board x,y; h text height)
J1: Mechanical 1 "PCB Edge" at 3843.91,6047.02 h9.84 r180
J3: Mechanical 1 "PCB Edge" at 4338.91,6047.02 h9.84 r180
J4: Top Overlay "6" at 4866.73,5853.13 h59.06; Top Overlay "9" at 5193.9,5853.13 h59.06; Top Overlay "5" at 5248.43,5483.06 h59.06; Top Overlay "1" at 4822.05,5483.06 h59.06
U9: Top Overlay "1" at 5232.95,3327.56 h59.05 r90; Top Overlay "3" at 5335.12,3327.56 h59.05 r90